# EAGLE board AU123_rev2 (EAGLE 6.5.0)
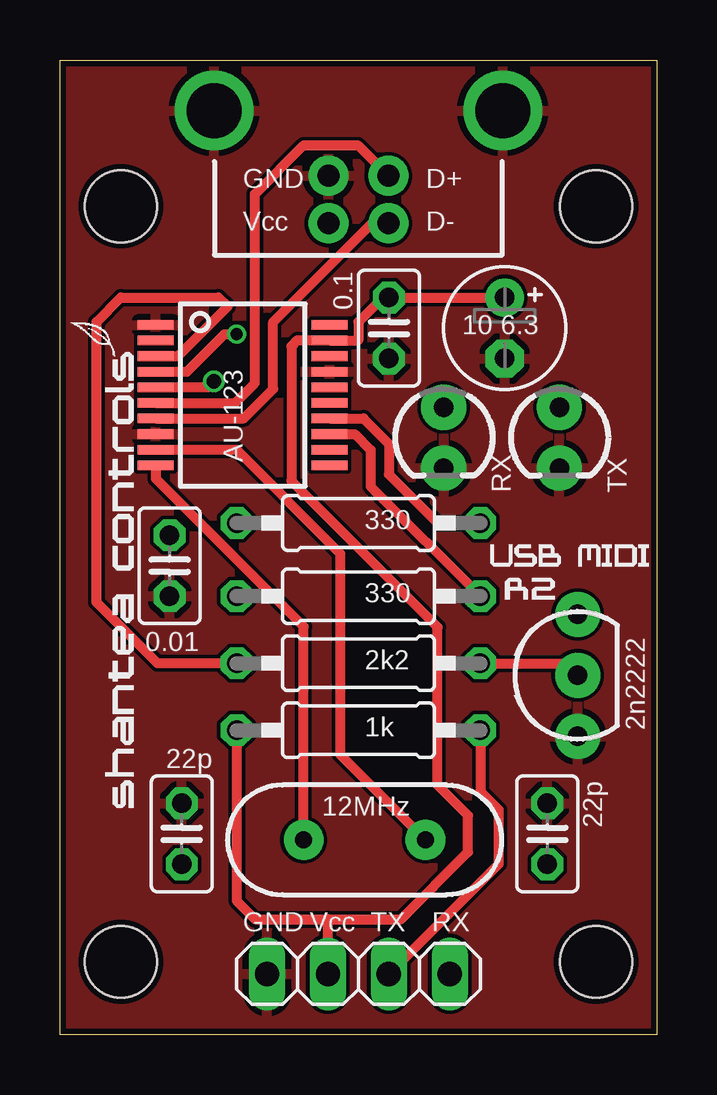
[diagram p0: board, top side]
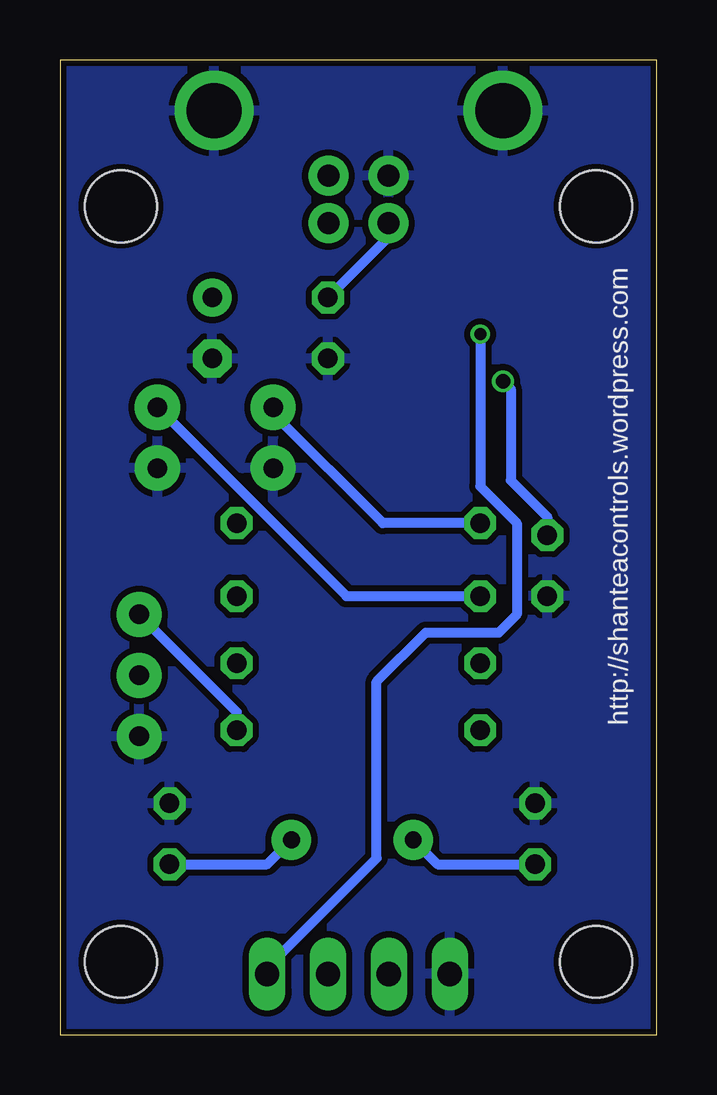
[diagram p1: board, bottom side, seen from below]

Size 24.89 x 40.64 mm. Coordinates in mm from the lower left corner, seen from the top.
Outline: 24.89,40.64 24.89,0 0,0 0,40.64 24.89,40.64
Copper layers (1*16): Top 0.035mm / dielectric 1.5mm / Bottom 0.035mm
Design rules "ITEADstudio_DRC *": minimum track width 6mil, minimum drill 12mil, track to track 6mil, track to pad 6mil, pad to pad 6mil, via to via 6mil, smd to smd 0mil, copper to edge 10mil, drill to drill 10mil, minimum pad ring 10mil, minimum via ring 6mil, stop-mask expansion 2mil, vias tented up to drill 100mil, thermal gap 10mil
Holes 3 mm at 2.54,34.54 22.35,34.54 2.54,3.05 22.35,3.05

## Footprints (pad centres in the part's own frame; a part is rotated, then mirrored left to right if it is on the bottom)
1X04 = drill 1.016 long: 1 -3.81,0; 2 -1.27,0; 3 1.27,0; 4 3.81,0
C025-025X050 = drill 0.813 octagon: 1 -1.27,0; 2 1.27,0
0207/10 = drill 0.813 octagon: 1 -5.08,0; 2 5.08,0
LED3MM = drill 0.813 pad 1.88: A -1.27,0; K 1.27,0
USB-B-PTH = drill 0.914 pad 1.676: D+ 0,1.25; D- 1.981,1.25; GND 0,-1.25; VBUS 1.981,-1.25 | drill 2.286: S1 -2.718,-6.02; S2 -2.718,6.02
E2,5-5 = drill 0.813 pad 1.6: + -1.27,0 | drill 0.813 pad 1.6 octagon: - 1.27,0
TO-92-AMMO = drill 0.813 pad 1.88: 1 -2.54,0; 2 0,0; 3 2.54,0
SSOP20 = smd 0.4 x 1.5: 1 -2.925,-3.625; 2 -2.275,-3.625; 3 -1.625,-3.625; 4 -0.975,-3.625; 5 -0.325,-3.625; 6 0.325,-3.625; 7 0.975,-3.625; 8 1.625,-3.625; 9 2.275,-3.625; 10 2.925,-3.625; 11 2.925,3.625; 12 2.275,3.625; 13 1.625,3.625; 14 0.975,3.625; 15 0.325,3.625; 16 -0.325,3.625; 17 -0.975,3.625; 18 -1.625,3.625; 19 -2.275,3.625; 20 -2.925,3.625
HC49US = drill 0.7 pad 1.651: 1 -2.54,0; 2 2.54,0

## Placement (x,y rotation side)
E$1  [1X04]  12.45,2.54 0 top
E$2  [C025-025X050]  13.72,29.46 90 top
E$3  [C025-025X050]  5.08,8.38 90 top
E$4  [C025-025X050]  20.32,8.38 90 top
E$5  [0207/10]  12.45,15.49 180 top
E$6  [0207/10]  12.45,21.34 0 top
E$7  [0207/10]  12.45,18.29 0 top
E$8  [LED3MM]  20.83,24.89 270 top
E$9  [LED3MM]  16,24.89 270 top
E$10  [C025-025X050]  4.57,19.56 270 top
E$11  [USB-B-PTH]  12.45,35.81 270 top
E$13  [E2,5-5]  18.54,29.46 270 top
E$14  [0207/10]  12.45,12.7 180 top
E$16  [TO-92-AMMO]  21.59,14.99 90 top
E$26  [SSOP20]  7.62,26.67 270 top
E$56  [HC49US]  12.7,8.13 0 top

## Library data of the parts
E$1 = pinhead
E$2-E$7 E$10 E$13 E$14 = rcl
E$8 E$9 = SparkFun-LED
E$11 = SparkFun-Connectors-edit
E$16 = SparkFun-DiscreteSemi
E$26 = SparkFun-RF
E$56 = SparkFun-FreqCtrl

## Nets
D+: E$11.D+ E$26.6
D-: E$11.D- E$26.7
GND: E$1.1 E$2.1 E$3.2 E$4.2 E$8.K E$9.K E$10.2 E$11.GND E$11.S1 E$11.S2 E$13.- E$16.1 E$26.1 E$26.8 E$26.17
MID_IN: E$1.4 E$26.4
MIDI_OUT: E$5.2 E$26.3
RX_LED: E$6.1 E$9.A
S$4: E$6.2 E$26.14
S$7: E$5.1 E$16.2
S$8: E$1.3 E$14.1 E$16.3
TX: E$7.2 E$26.13
TX_LED: E$7.1 E$8.A
V3: E$10.1 E$26.5
VCC: E$1.2 E$2.2 E$11.VBUS E$13.+ E$14.2 E$26.19
XI: E$4.1 E$26.9 E$56.2
XO: E$3.1 E$26.10 E$56.1

## Tracks (layer width: path | path; a pad name or v marks a point on that pad's centre or on a via)
D+
  Top 0.406: E$26.6 7.3,26.35 8.13,27.18 8.13,35.05 10.16,37.08 12.43,37.08 E$11.D+
D-
  Top 0.406: E$26.7 7.66,25.69 8.89,26.92 8.89,29.72 13,33.83 E$11.D-
GND
  pour Bottom (isolate 0.254): -0.25,40.96 25.15,40.96 25.15,-0.25 -0.25,-0.25
  pour Top: -0.25,40.96 25.15,40.96 25.15,-0.25 -0.25,-0.25
MID_IN  (via drill 0.5)
  Top 0.406: E$26.4 5.29,27.64 6.86,29.21 v7.37,29.21
  Bottom 0.406: v7.37,29.21 7.37,22.86 5.84,21.34 5.84,17.53 6.6,16.76 9.65,16.76 11.68,14.73 11.68,7.37 16.26,2.79 E$1.4
MIDI_OUT
  Top 0.406: E$26.3 4.93,28.29 6.99,30.35 6.6,30.73 2.54,30.73 1.52,29.72 1.52,18.03 4.06,15.49 E$5.2
RX_LED
  Bottom 0.406: E$6.1 11.43,21.34 16,25.91 E$9.A
S$4
  Top 0.406: E$26.14 12.66,25.69 13.72,24.64 13.72,23.37 15.75,21.34 E$6.2
S$7
  Top 0.406: E$5.1 21.08,15.49 E$16.2
S$8
  Top 0.406: E$14.1 17.53,10.16 18.29,9.4 18.29,7.11 E$1.3
  Bottom 0.406: E$14.1 17.53,13.46 E$16.3
TX
  Top 0.406: E$7.2 12.95,22.86 12.95,24.38 12.29,25.04 E$26.13
TX_LED
  Bottom 0.406: E$7.1 12.95,18.29 E$8.A
V3  (via drill 0.6)
  Top 0.406: E$26.5 6.17,27 v6.42,27.25
  Bottom 0.406: E$10.1 4.57,21.59 4.83,21.84 6.1,23.11 6.1,26.92 v6.42,27.25
VCC
  Top 0.406: 11.18,4.83 8.13,4.83 7.37,5.59 E$14.2 | 11.18,4.83 14.22,4.83 17.02,7.62 17.02,9.14 15.75,10.41 15.75,17 9.65,23.09 9.65,28.7 9.89,28.94 E$26.19 12.44,28.94 12.45,28.96 12.45,29.72 13.46,30.73 E$2.2 E$13.+ | E$1.2 11.18,4.83
  Bottom 0.406: E$11.VBUS 11.2,33.25 E$2.2
XI
  Top 0.406: E$26.9 7.35,24.39 11.68,20.07 11.68,11.68 E$56.2
  Bottom 0.406: E$4.1 16.26,7.11 E$56.2
XO
  Top 0.406: E$56.1 10.16,17.02 4,23.18 E$26.10
  Bottom 0.406: E$56.1 9.14,7.11 E$3.1

## Text on the board
tNames: GND | D+ | Vcc | D- | 0.1 | 10 6.3 | AU-123 | RX | TX | 330 | 330 | 0.01 | 2k2 | 1k | 2n2222 | 22p | 12MHz | 22p | GND | Vcc | TX | RX
bNames: http://shanteacontrols.wordpress.com